# Altium PCB Fan_tray.PcbDoc
Units mm, origin at the board's own origin, x right, y up, seen from the top; angles counter-clockwise.
Board outline 271 x 20 mm, 2 copper layers (Top Layer, Bottom Layer), stack 1.571 mm thick; 13 components, 0 nets, 52 pads, 0 vias.
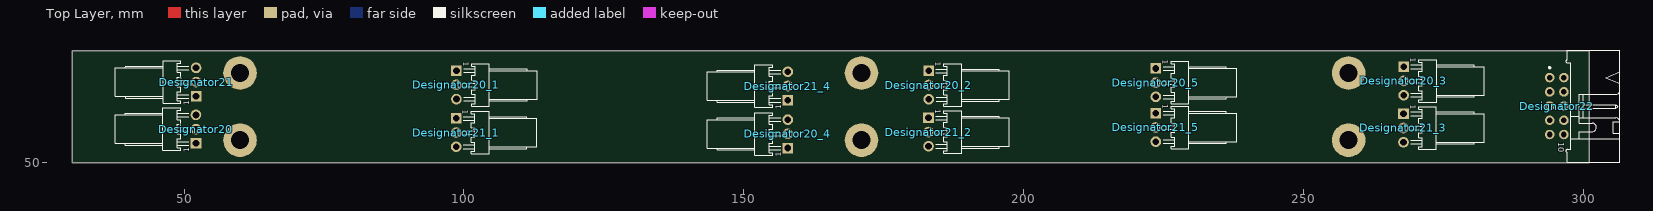
[diagram p0: Top Layer view]
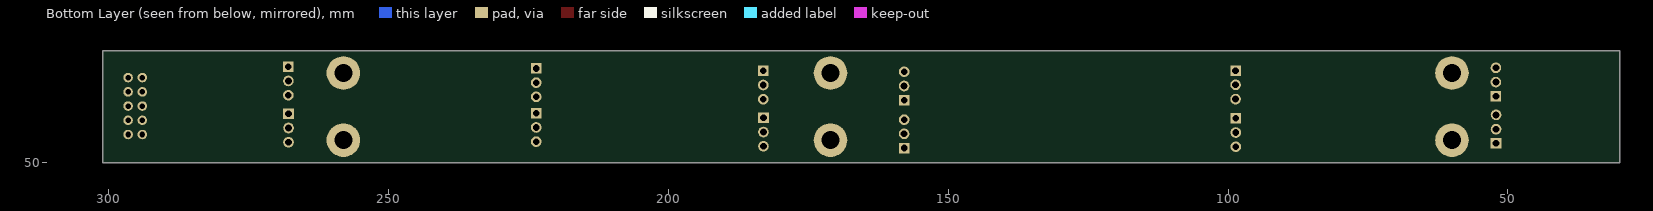
[diagram p1: Bottom Layer view, seen from below]

## Layer stack, top to bottom
Top Solder: solder mask 0.0102, Solder Resist, Dk 3.5
Top Layer: signal copper 0.0356
Dielectric 1: dielectric 1.5, FR-4, Dk 4.8
Bottom Layer: signal copper 0.0356
Bottom Solder: solder mask 0.0102, Solder Resist, Dk 3.5

## Board outline
30,50 301,50 301,70 30,70

## Design rules (kind name [scope] priority, off if disabled: settings)
Clearance [All] p1: gap=0.254 ignorepadtopadclearanceinfootprint=FALSE
PolygonConnect [All] p1: connectstyle=Relief reliefconductorwidth=0.254 reliefentries=4 polygonreliefangle="90 Angle" airgapwidth=0.254
RoutingVias [All] p1: holewidth=0.711 width=1.27 viastyle="Through Hole" minholewidth=0.711 minwidth=1.27 maxholewidth=0.711 maxwidth=1.27
SolderMaskExpansion [All] p1: expansion=0.102 istentingtop=FALSE
Width [All] p1: maxlimit=0.254 minlimit=0.254 preferedwidth=0.254
30 further rules are at their usual default settings.

## Components (designator, comment, footprint, x,y, rotation, side; value= is the part's Value field where it differs from the comment)
Designator20 "Comment" MOLEX_22-05-7038 52.125,55.975 r90 top
Designator20_1 "Comment" MOLEX_22-05-7038 98.65,63.875 r270 top
Designator20_2 "Comment" MOLEX_22-05-7038 183,63.85 r270 top
Designator20_3 "Comment" MOLEX_22-05-7038 267.825,64.575 r270 top
Designator20_4 "Comment" MOLEX_22-05-7038 157.85,55.125 r90 top
Designator20_5 "Comment" MOLEX_22-05-7038 223.575,64.275 r270 top
Designator21 "Comment" MOLEX_22-05-7038 52.15,64.375 r90 top
Designator21_1 "Comment" MOLEX_22-05-7038 98.6,55.365 r270 top
Designator21_2 "Comment" MOLEX_22-05-7038 182.975,55.45 r270 top
Designator21_3 "Comment" MOLEX_22-05-7038 267.8,56.175 r270 top
Designator21_4 "Comment" MOLEX_22-05-7038 157.85,63.675 r90 top
Designator21_5 "Comment" MOLEX_22-05-7038 223.575,56.275 r270 top
Designator22 "Comment" 3M_N2510-5002RB 295.18,60.09 r270 top

## Footprints (in the part's own frame and the unit in brackets; to place one, negate y for a bottom-side part, rotate by r counter-clockwise, add the part's x,y. Pads: shape width x height; smd on the part's side, far side on the other; paste and mask are expansions set on the pad)
3M_N2510-5002RB [mm] "10 Contacts - Right Angle .100\" x .100\" Low Profile Four-Wall Header"
  round 1.7 hole 1: 1(-5.08,-1.27) 2(-5.08,1.27) 3(-2.54,-1.27) 4(-2.54,1.27) 5(0,-1.27) 6(0,1.27) 7(2.54,-1.27) 8(2.54,1.27) 9(5.08,-1.27) 10(5.08,1.27)
  silkscreen extent -10,-1.42 10.01,11.28, body extent -10,-1.59 10.01,11.27, height 8.64
MOLEX_22-05-7038 [mm] "2.54mm (.100\") Pitch KK® Wire-To-Board Header, Right Angle, With Friction Lock, 3 Circuits"
  rect 1.9x1.9 hole 1.2: 1(-2.54,0)
  round 1.9 hole 1.2: 2(0,-0.005) 3(2.54,0)
  silkscreen extent -3.81,1.3 3.81,14.42, body extent -3.81,-0.32 3.81,14.42, height 5.84

## Free pads (board coordinates)
  round 6 hole 3.2: 1(60,66) 2(60,54) 3(171,66) 4(171,54) 5(258,66) 6(258,54)

## Nets (pads, with @x,y where several pads share a name; then routed paths per layer and width w, separated by ;. In a path a pad name is that pad's centre, name@x,y a point inside that pad or via, vN(x,y) a via of type N, cw(c..) or ccw(c..) an arc to the next point about the centre after c; other vN are vias at no path point)
pads on no net: Designator20.1 Designator20.2 Designator20.3 Designator20_1.1 Designator20_1.2 Designator20_1.3 Designator20_2.1 Designator20_2.2 Designator20_2.3 Designator20_3.1 Designator20_3.2 Designator20_3.3 Designator20_4.1 Designator20_4.2 Designator20_4.3 Designator20_5.1 Designator20_5.2 Designator20_5.3 Designator21.1 Designator21.2 Designator21.3 Designator21_1.1 Designator21_1.2 Designator21_1.3 Designator21_2.1 Designator21_2.2 Designator21_2.3 Designator21_3.1 Designator21_3.2 Designator21_3.3 Designator21_4.1 Designator21_4.2 Designator21_4.3 Designator21_5.1 Designator21_5.2 Designator21_5.3 Designator22.1 Designator22.2 Designator22.3 Designator22.4 Designator22.5 Designator22.6 Designator22.7 Designator22.8 Designator22.9 Designator22.10

## Silkscreen, mask and mechanical layers (free items; w line width, h text height)
Mechanical 1:
  the board outline again, w0.254
Mechanical 8:
  lines w0.254: 33,71 118,71 ; 33,73 138,73 138,74 243,74 243,73 ; 118,69 203,69 ; 203,71 288,71

## Text inside footprints (layer, text, board x,y; h text height)
Designator20: Top Overlay "1" at 50.932,51.863 h1 r90; Mechanical 14 "1" at 50.932,51.863 h1 r90
Designator20_1: Top Overlay "1" at 99.843,67.987 h1 r270; Mechanical 14 "1" at 99.843,67.987 h1 r270
Designator20_2: Top Overlay "1" at 184.193,67.962 h1 r270; Mechanical 14 "1" at 184.193,67.962 h1 r270
Designator20_3: Top Overlay "1" at 269.018,68.687 h1 r270; Mechanical 14 "1" at 269.018,68.687 h1 r270
Designator20_4: Top Overlay "1" at 156.657,51.012 h1 r90; Mechanical 14 "1" at 156.657,51.012 h1 r90
Designator20_5: Top Overlay "1" at 224.768,68.388 h1 r270; Mechanical 14 "1" at 224.768,68.388 h1 r270
Designator21: Top Overlay "1" at 50.957,60.263 h1 r90; Mechanical 14 "1" at 50.957,60.263 h1 r90
Designator21_1: Top Overlay "1" at 99.793,59.477 h1 r270; Mechanical 14 "1" at 99.793,59.477 h1 r270
Designator21_2: Top Overlay "1" at 184.168,59.562 h1 r270; Mechanical 14 "1" at 184.168,59.562 h1 r270
Designator21_3: Top Overlay "1" at 268.993,60.287 h1 r270; Mechanical 14 "1" at 268.993,60.287 h1 r270
Designator21_4: Top Overlay "1" at 156.657,59.562 h1 r90; Mechanical 14 "1" at 156.657,59.562 h1 r90
Designator21_5: Top Overlay "1" at 224.768,60.388 h1 r270; Mechanical 14 "1" at 224.768,60.388 h1 r270
Designator22: Top Overlay "10" at 295.48,53.59 h1.02 r270; Mechanical 14 "10" at 295.48,53.59 h1.02 r270